# EAGLE board single_color_WL-SFCC v23 (EAGLE 9.7.0)
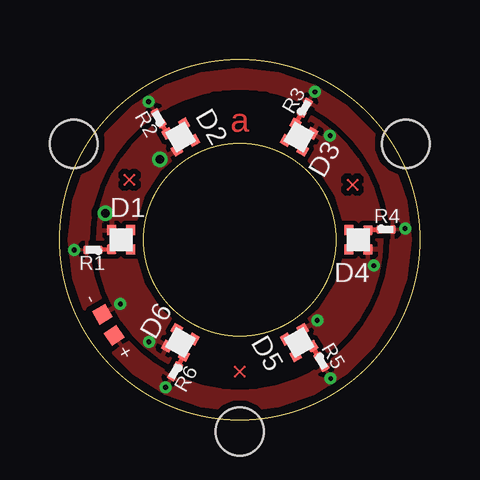
[diagram p0: board, top side]
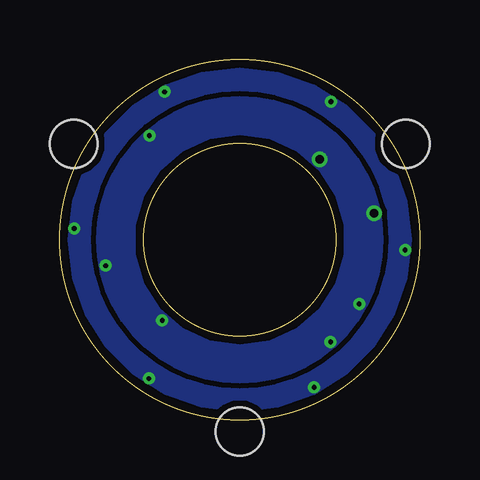
[diagram p1: board, bottom side, seen from below]

Size 15 x 15 mm. Coordinates in mm from the lower left corner, seen from the top.
Outline: circle at 7.5,7.5 radius 4
Outline: circle at 7.5,7.5 radius 7.5
Copper layers (1*16): Top / Bottom
Stack-up Default Layer Stack: Top User Defined 0.035mm / Dielectric-1 User Defined 1.5mm / Bottom User Defined 0.035mm
Design rules: minimum copper width 0.125mm, minimum drill size 0.2mm, copper clearance class=0 to class=0 0.205mm, copper clearance wire_polygon to wire_polygon 0.125mm, copper clearance wire_polygon to pad_smd 0.125mm, copper clearance wire_polygon to via 0.125mm, copper clearance pad_smd to pad_smd 0.125mm, copper clearance pad_smd to via 0.125mm, copper clearance via to via 0.125mm, copper clearance smd to pad (same net) 0.125mm, copper clearance smd to via (same net) 0.125mm, copper clearance smd to smd (same net) 0.125mm, dimension clearance 0.3mm, via restrict clearance 0mil, restrict clearance 0mil, drill distance 0.2mm, keepout clearance 0mil
Net classes: 0 default: clearance 0.205 mm
Holes 2 mm at 0.57,11.5 14.43,11.5 7.5,-0.5

## Footprints (pad centres in the part's own frame; a part is rotated, then mirrored left to right if it is on the bottom)
WL-SFCCSMT = smd 0.4 x 0.4: A -0.4,-0.4; B 0.4,0.4; G 0.4,-0.4; R -0.4,0.4
SMD_SMALL = smd 0.635 x 0.635: P$1 0,0
0201 = smd 0.25 x 0.35: P$1 -0.275,0; P$2 0.275,0
FIDUCIAL-SMDX_CPR = smd 0.025 x 0.025: P$1 0,0

## Placement (x,y rotation side)
D1  WL-SFCC  [WL-SFCCSMT]  2.55,7.5 0 top
D2  WL-SFCC  [WL-SFCCSMT]  5.03,11.79 300 top
D3  WL-SFCC  [WL-SFCCSMT]  9.97,11.79 240 top
D4  WL-SFCC  [WL-SFCCSMT]  12.45,7.5 180 top
D5  WL-SFCC  [WL-SFCCSMT]  9.97,3.21 120 top
D6  WL-SFCC  [WL-SFCCSMT]  5.03,3.21 60 top
PAD1  WIREPAD_SMALL  [SMD_SMALL]  1.77,4.39 120 top
PAD2  WIREPAD_SMALL  [SMD_SMALL]  2.26,3.51 35 top
R1  [0201]  1.38,7.08 180 top
R2  [0201]  4.11,12.57 120 top
R3  [0201]  10.22,13.01 60 top
R4  [0201]  13.61,7.93 0 top
R5  [0201]  10.9,2.4 300 top
R6  [0201]  4.8,2.01 240 top
U$1  FIDUCIALSMDX_COPPER  [FIDUCIAL-SMDX_CPR]  7.5,2 0 top
U$2  FIDUCIALSMDX_COPPER  [FIDUCIAL-SMDX_CPR]  2.9,10 0 top
U$3  FIDUCIALSMDX_COPPER  [FIDUCIAL-SMDX_CPR]  12.2,9.8 0 top

## Library data of the parts
D1-D6 = WL-SFCC
PAD1 PAD2 = wirepad
R1-R6 U$1-U$3 = Foxy

## Nets
GND: D1.R D2.G D3.R D4.R D5.G D6.R PAD1.P$1
N$1: D1.A R1.P$1
N$2: D4.A R4.P$1
N$6: D6.A R6.P$1
N$7: D5.A R5.P$1
N$8: D3.A R3.P$1
N$9: D2.A R2.P$1
VCC: PAD2.P$1 R1.P$2 R2.P$2 R3.P$2 R4.P$2 R5.P$2 R6.P$2

## Tracks (layer width: path | path; a pad name or v marks a point on that pad's centre or on a via)
GND  (via drill 0.2, 0.35)
  other vias: 3.71,3.24 2.52,4.82 10.73,4.13 13.09,6.42 11.27,11.84 1.89,8.61 4.17,10.86
  pour Top: 1.5,7.5 arc-90 7.5,13.5 arc-90 13.5,7.5 arc-90 7.5,1.5 arc-90
  pour Bottom: 1.5,7.5 arc-90 7.5,13.5 arc-90 13.5,7.5 arc-90 7.5,1.5 arc-90
N$1
  Top 0.2: D1.A R1.P$1
N$2
  Top 0.2: D4.A 12.88,7.93 R4.P$1
N$6
  Top 0.2: D6.A R6.P$1
N$7
  Top 0.2: D5.A R5.P$1
N$8
  Top 0.2: D3.A R3.P$1
N$9
  Top 0.2: D2.A R2.P$1
VCC  (via drill 0.2)
  other vias: 3.7,13.26 0.6,7.07 4.4,1.34 11.29,1.71 14.4,7.97 10.64,13.67
  pour Bottom (rank 2): 19.55,16.52 -2.27,16.52 -2.27,-2.19 19.55,-2.19
  pour Top (isolate 0.254, rank 2): 17.55,15.52 -4.27,15.52 -4.27,-3.19 17.55,-3.19

## Text on the board
Top: a
tNames: - | +
tStop: a